# EAGLE board PROIECT_v39 (EAGLE 9.7.0)
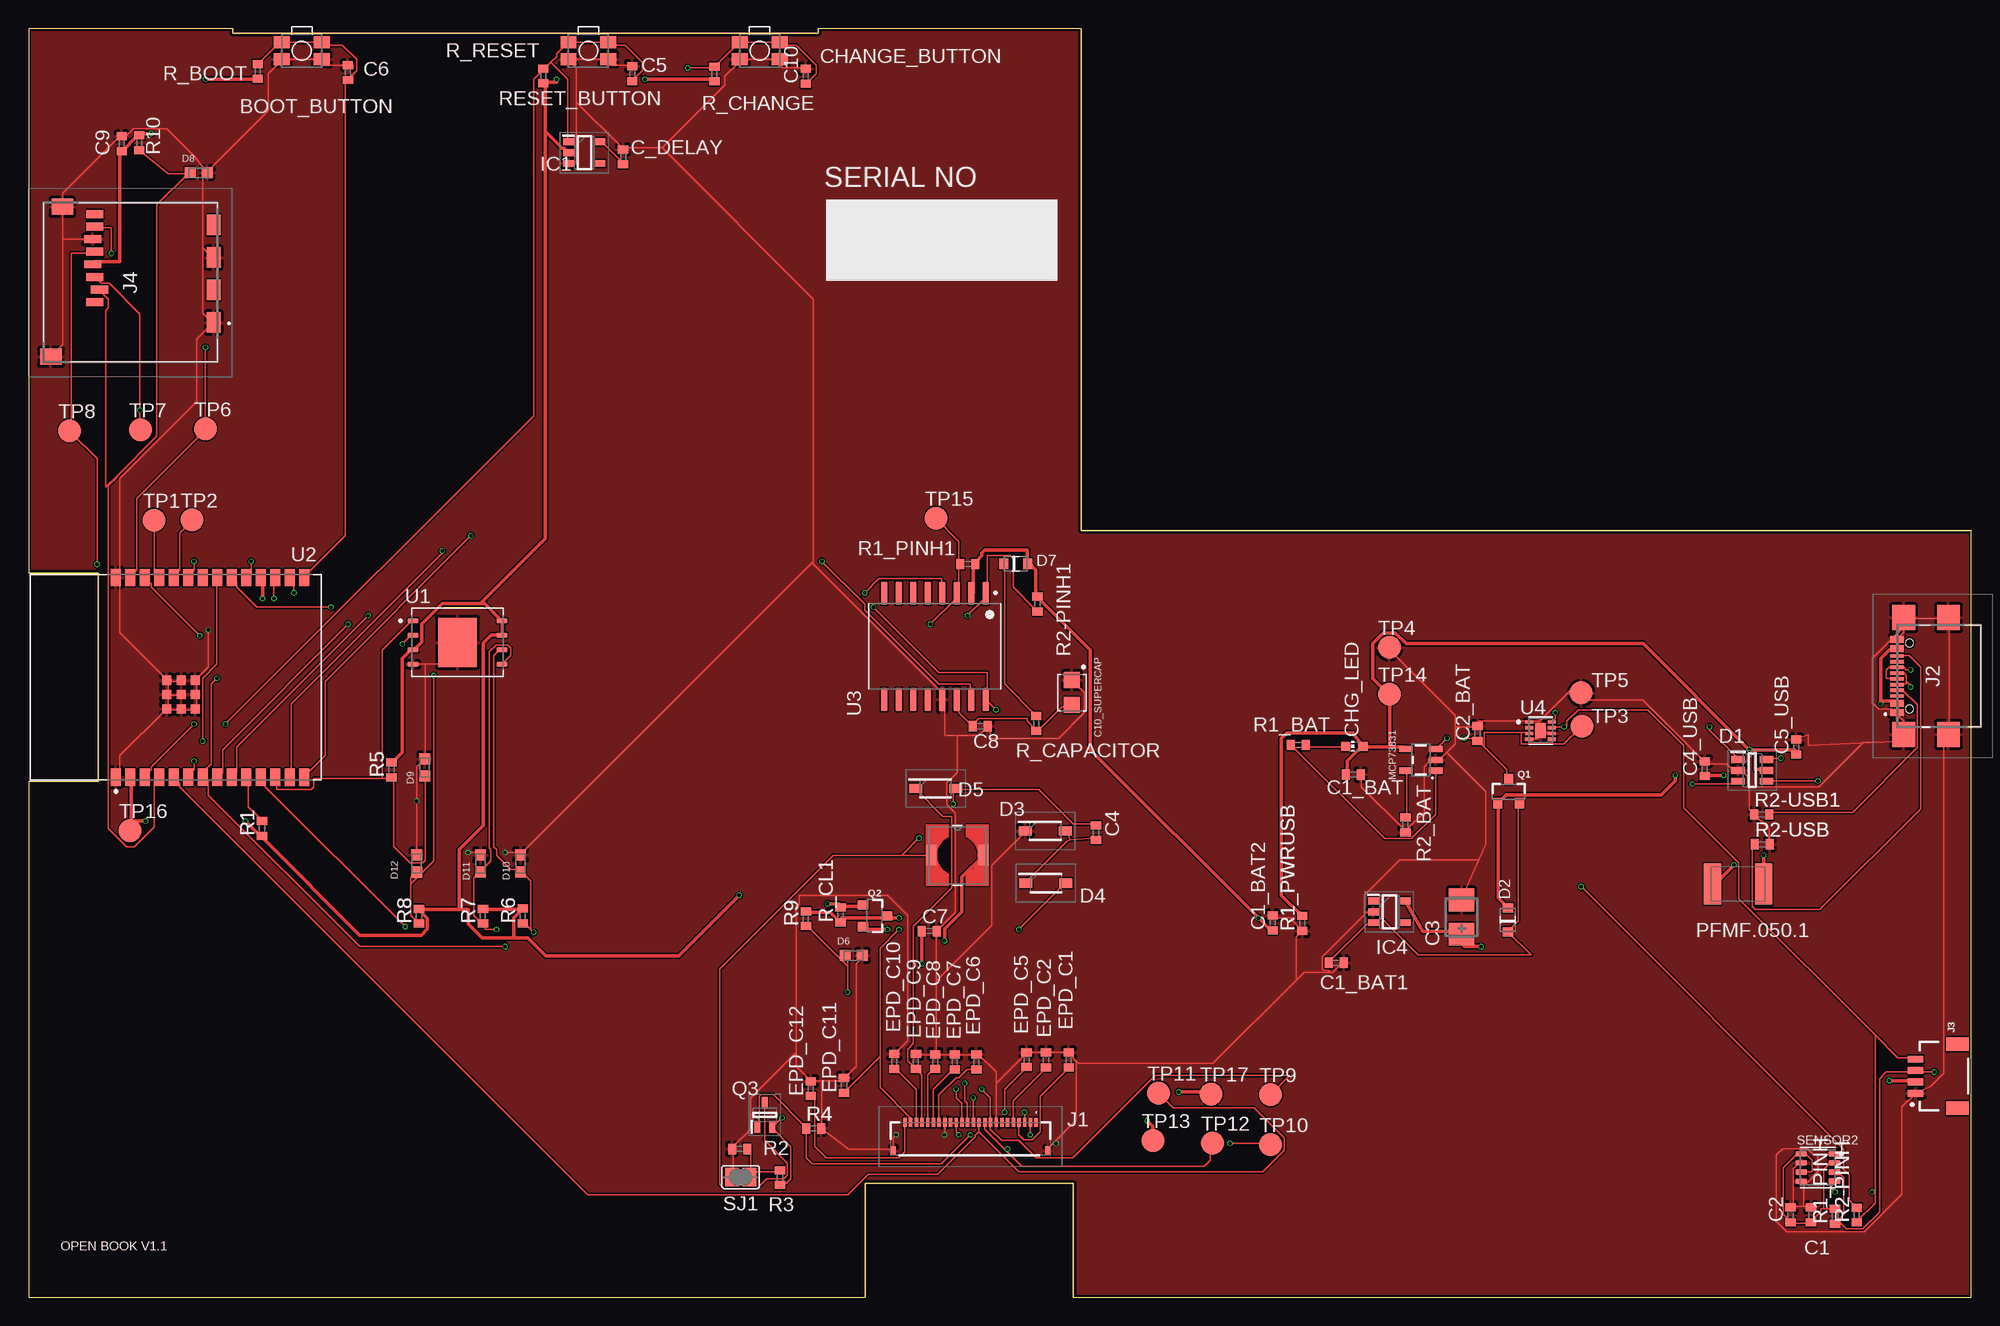
[diagram p0: board, top side]
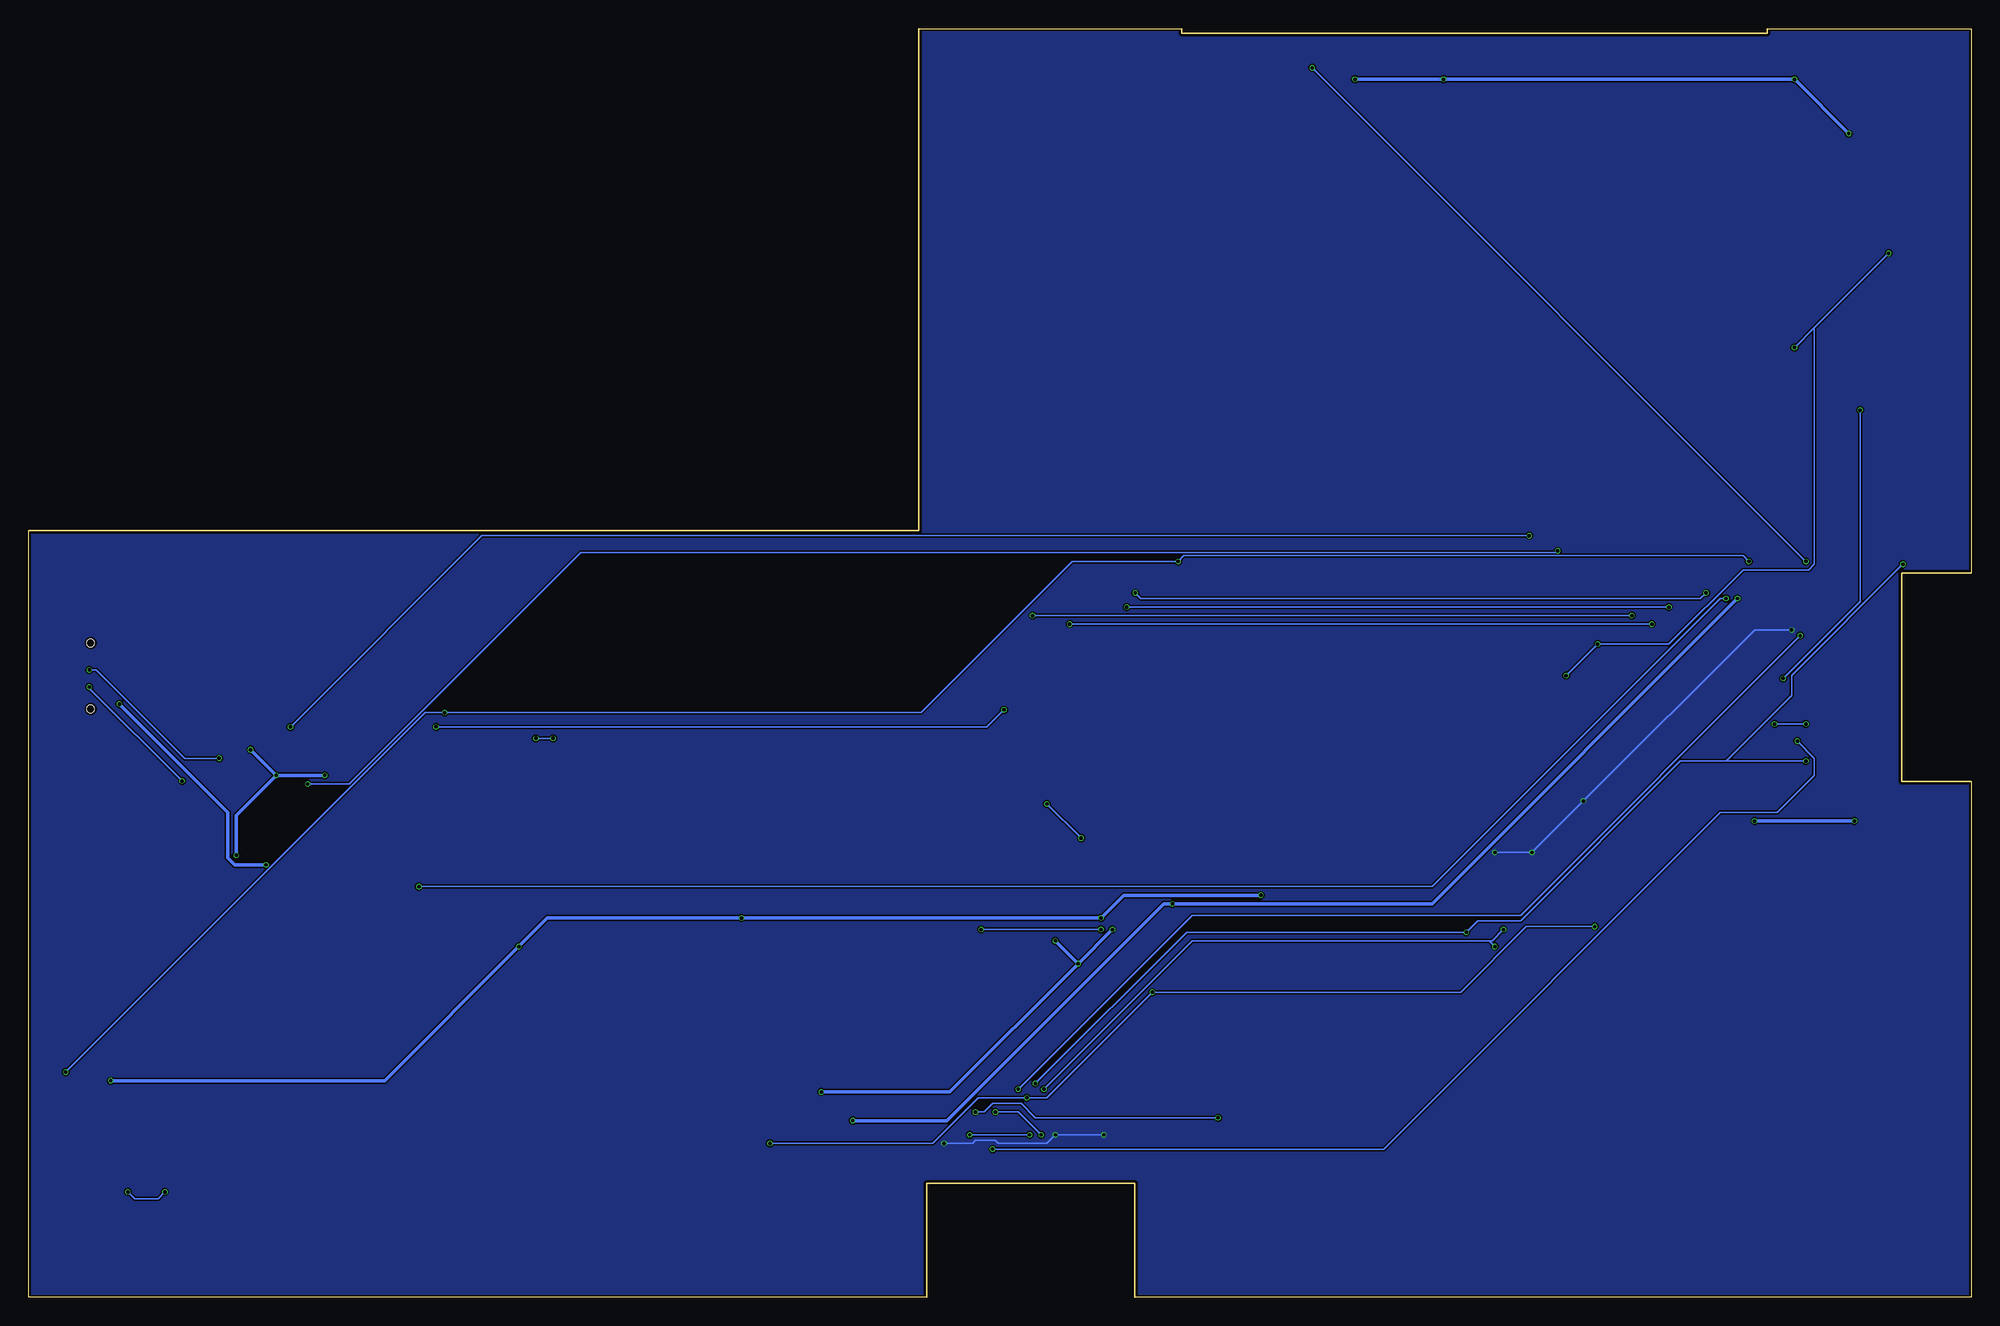
[diagram p1: board, bottom side, seen from below]

Size 170.2 x 111.2 mm. Coordinates in mm from the lower left corner, seen from the top.
Outline: 0,0 73.3,0 73.3,10 91.5,10 91.5,0 170.2,0 170.2,67.2 92.2,67.2 92.2,111.2 69.2,111.2 69.2,110.8 17.9,110.8 17.9,111.2 0,111.2 0,63.5 6.1,63.5 6.1,45.2 0,45.2 0,0
Copper layers (1*16): Top 0.035mm / dielectric 1.6mm / Bottom 0.035mm
Design rules "jlcpcb-2layers.dru": minimum track width 0.15mm, minimum drill 0.3mm, track to track 5mil, track to pad 5mil, pad to pad 5mil, via to via 5mil, smd to smd 5mil, copper to edge 0.2mm, drill to drill 6mil, minimum pad ring 10mil, minimum via ring 3mil, stop-mask expansion 4mil, vias tented up to drill 0mil, thermal gap 10mil
Net classes: 1 alimentare: width 0.3 mm

## Footprints (pad centres in the part's own frame; a part is rotated, then mirrored left to right if it is on the bottom)
MYBUTTON = smd 1.4 x 1.05: 1 1.75,0.75; 2 -1.75,0.75; 3 -1.75,-0.75; 4 1.75,-0.75
EAGLE-LTSPICE_C0402 = smd 0.7 x 0.9: 1 -0.65,0; 2 0.65,0
RCL_CT3528 = smd 2 x 2.2: + -1.5,0; - 1.5,0
CAPCP3225X100N = smd 1.4 x 1.4: 1 -1.1,0; 2 1.1,0
ADAFRUIT_CHIP-LED0603 = smd 0.8 x 0.8: A 0,-0.75; C 0,0.75
SOT95P280X145-6N = smd 1.2 x 0.6: 1 -1.25,0.95; 2 -1.25,0; 3 -1.25,-0.95; 4 1.25,-0.95; 5 1.25,0; 6 1.25,0.95
ESP32_WROVER_AVX---SD0805S020S1R0_AVX_SD0805S020S1R0_0 = smd 0.8 x 0.9: 1 -1.05,0; 2 1.05,0
SOD3716X135N = smd 1.15 x 0.8: 1 -1.75,0; 2 1.75,0
DIOC1608X36N = smd 0.97 x 0.94: 1 -0.75,0; 2 0.75,0
SOT95P280X125-5N = smd 0.9 x 0.6: 1 -1.4,0.95; 2 -1.4,0; 3 -1.4,-0.95; 4 1.4,-0.95; 5 1.4,0.95
SOT95P280X120-5N = smd 0.9 x 0.6: 1 -1.4,0.95; 2 -1.4,0; 3 -1.4,-0.95; 4 1.4,-0.95; 5 1.4,0.95
FH34SRJ24S05SH99 = smd 0.3 x 0.8: 1 5.75,1.45; 2 5.25,1.45; 3 4.75,1.45; 4 4.25,1.45; 5 3.75,1.45; 6 3.25,1.45; 7 2.75,1.45; 8 2.25,1.45; 9 1.75,1.45; 10 1.25,1.45; 11 0.75,1.45; 12 0.25,1.45; 13 -0.25,1.45; 14 -0.75,1.45; 15 -1.25,1.45; 16 -1.75,1.45; 17 -2.25,1.45; 18 -2.75,1.45; 19 -3.25,1.45; 20 -3.75,1.45; 21 -4.25,1.45; 22 -4.75,1.45; 23 -5.25,1.45; 24 -5.75,1.45 | smd 0.4 x 0.8: MP1 6.75,-1.05; MP2 -6.75,-1.05
SAMACSYS_PARTS_USB4110GFA = smd 0.3 x 1.15: A1 -3.35,3.678; A4 -2.55,3.678; A5 -1.25,3.678; A6 -0.25,3.678; A7 0.25,3.678; A8 1.25,3.678; A9 2.55,3.678; A12 3.35,3.678; B1 3.05,3.678; B4 2.25,3.678; B5 1.75,3.678; B6 0.75,3.678; B7 -0.75,3.678; B8 -1.75,3.678; B9 -2.25,3.678; B12 -3.05,3.678 | smd 2.18 x 2: MP1 -5.11,-0.827; MP2 5.11,-0.827; MP3 -5.11,3.103; MP4 5.11,3.103 | hole 0.65: -2.89,2.603; 2.89,2.603
JST04_1MM_RA = smd 0.6 x 1.35: 1 -1.5,0; 2 -0.5,0; 3 0.5,0; 4 1.5,0 | smd 1.2 x 2: NC1 2.8,-3.675; NC2 -2.8,-3.675
112ATAARR03ATTEND = smd 1.8 x 1.2: G1 10.6,10.4; G2 4.9,10.4; S1 7.75,10.4; S2 2.05,10.4 | smd 1.4 x 1.9: G3 13.6,-3.85; G4 0.45,-2.85 | smd 0.7 x 1.5: P1 8.8,0; P2 7.7,0.4; P3 6.6,0; P4 5.5,-0.2; P5 4.4,0; P6 3.3,-0.2; P7 2.2,0; P8 1.1,0
IND_4828-WE-TPC_WRE = smd 0.889 x 1.778: 1 -2.286,0; 2 2.286,0
ESP32_WROVER_SPARKFUN-IC-POWER_SOT23-5 = smd 0.55 x 1.2: 1 -0.95,-1.3; 2 0,-1.3; 3 0.95,-1.3; 4 0.95,1.3; 5 -0.95,1.3
ESP32C6_VARISTOR_CT/CN1812 = smd 1.5 x 3.6: 1 -2.25,0; 2 2.25,0
ESP32_WROVER_SPARKFUN-DISCRETESEMI_SOT23-3 = smd 0.8 x 0.9: 1 -0.95,-1; 2 0.95,-1; 3 0,1.1
SOT65P210X110-3N = smd 1.05 x 0.5: 1 -1.05,0.65; 2 -1.05,-0.65; 3 1.05,0
ESP32_WROVER_EAGLE-LTSPICE_R0402 = smd 0.7 x 0.9: 1 -0.65,0; 2 0.65,0
ESP32_WROVER_BME680_PSON80P300X300X100-8N = smd 1.016 x 0.5: 1 1.458,1.2; 2 1.458,0.4; 3 1.458,-0.4; 4 1.458,-1.2; 5 -1.458,-1.22; 6 -1.458,-0.4; 7 -1.458,0.4; 8 -1.458,1.2
SJ = smd 1.168 x 1.6: 1 -0.762,0; 2 0.762,0
TP20R = smd 2 x 2: TP 0,0
SON127P600X800X80-9N = smd 0.94 x 0.44: 1 -3.895,1.905; 2 -3.895,0.635; 3 -3.895,-0.635; 4 -3.895,-1.905; 5 3.895,-1.905; 6 3.895,-0.635; 7 3.895,0.635; 8 3.895,1.905 | smd 3.4 x 4.3: 9 0,0
XCVR_ESP32-C6-WROOM-1-N8 = smd 1.5 x 0.9: 1 -8.75,5.26; 2 -8.75,3.99; 3 -8.75,2.72; 4 -8.75,1.45; 5 -8.75,0.18; 6 -8.75,-1.09; 7 -8.75,-2.36; 8 -8.75,-3.63; 9 -8.75,-4.9; 10 -8.75,-6.17; 11 -8.75,-7.44; 12 -8.75,-8.71; 13 -8.75,-9.98; 14 -8.75,-11.25; 15 8.75,-11.25; 16 8.75,-9.98; 17 8.75,-8.71; 18 8.75,-7.44; 19 8.75,-6.17; 20 8.75,-4.9; 21 8.75,-3.63; 22 8.75,-2.36; 23 8.75,-1.09; 24 8.75,0.18; 25 8.75,1.45; 26 8.75,2.72; 27 8.75,3.99; 28 8.75,5.26 | smd 0.8 x 0.8: 29_1 -2.755,0.79; 29_2 -1.505,0.79; 29_3 -0.255,0.79; 29_4 -2.755,-0.46; 29_5 -1.505,-0.46; 29_6 -0.255,-0.46; 29_7 -2.755,-1.71; 29_8 -1.505,-1.71; 29_9 -0.255,-1.71
SOIC127P1032X265-16N = smd 2.05 x 0.59: 1 -4.655,4.445; 2 -4.655,3.175; 3 -4.655,1.905; 4 -4.655,0.635; 5 -4.655,-0.635; 6 -4.655,-1.905; 7 -4.655,-3.175; 8 -4.655,-4.445; 9 4.655,-4.445; 10 4.655,-3.175; 11 4.655,-1.905; 12 4.655,-0.635; 13 4.655,0.635; 14 4.655,1.905; 15 4.655,3.175; 16 4.655,4.445
SON50P200X200X80-9N = smd 0.76 x 0.27: 1 -0.985,0.75; 2 -0.985,0.25; 3 -0.985,-0.25; 4 -0.985,-0.75; 5 0.985,-0.75; 6 0.985,-0.25; 7 0.985,0.25; 8 0.985,0.75 | smd 0.9 x 1.3: 9 0,0

## Placement (x,y rotation side)
BOOT_BUTTON  BUTTON_CUSYOMV1.  [MYBUTTON]  23.94,109.25 180 top
C1  100nF  [EAGLE-LTSPICE_C0402]  156.15,7.23 90 top
C1_BAT  4.7uF  [EAGLE-LTSPICE_C0402]  116.04,45.82 0 top
C1_BAT1  4.7uF  [EAGLE-LTSPICE_C0402]  114.55,29.33 0 top
C1_BAT2  4.7uF  [EAGLE-LTSPICE_C0402]  108.99,32.83 90 top
C2  100nF  [EAGLE-LTSPICE_C0402]  154.35,7.24 90 top
C2_BAT  4.7uF  [EAGLE-LTSPICE_C0402]  126.93,49.42 90 top
C3  100uF TANT  [RCL_CT3528]  125.53,33.34 90 top
C4  4.7uF/25V  [EAGLE-LTSPICE_C0402]  93.51,40.73 90 top
C4_USB  100nF  [EAGLE-LTSPICE_C0402]  146.84,46.33 90 top
C5  1uF  [EAGLE-LTSPICE_C0402]  52.88,107.25 90 top
C5_USB  4.7uF  [EAGLE-LTSPICE_C0402]  154.85,48.23 90 top
C6  100nF  [EAGLE-LTSPICE_C0402]  27.98,107.34 90.7 top
C7  10uF  [EAGLE-LTSPICE_C0402]  78.91,32.11 0 top
C8  100nF  [EAGLE-LTSPICE_C0402]  83.38,50.06 0 top
C9  100nF  [EAGLE-LTSPICE_C0402]  8.16,101.11 90 top
C10  100nF  [EAGLE-LTSPICE_C0402]  68.08,107.03 90 top
C10_SUPERCAP  CPH3225A.  [CAPCP3225X100N]  91.4,53 270 top
C_DELAY  100nF  [EAGLE-LTSPICE_C0402]  52.08,99.95 90 top
CHANGE_BUTTON  BUTTON_CUSYOMV1.  [MYBUTTON]  64.05,109.25 180 top
CHG_LED  [ADAFRUIT_CHIP-LED0603]  116.15,48.3 90 top
D1  USBLC6-2SC6Y.  [SOT95P280X145-6N]  151,46.19 0 top
D2  ESP32_WROVER_AVX---SD0805S020S1R0_AVX_SD0805S020S1R0_0_0AVX_SD0805S020S1R0_0_0  [ESP32_WROVER_AVX---SD0805S020S1R0_AVX_SD0805S020S1R0_0]  129.59,33.1 90 top
D3  MBR0530.  [SOD3716X135N]  89.06,40.89 0 top
D4  MBR0530.  [SOD3716X135N]  89.12,36.3 0 top
D5  MBR0530.  [SOD3716X135N]  79.46,44.6 0 top
D6  PGB1010603MR.  [DIOC1608X36N]  72.3,29.97 0 top
D7  ESP32_WROVER_AVX---SD0805S020S1R0_AVX_SD0805S020S1R0_0_0AVX_SD0805S020S1R0_0_0  [ESP32_WROVER_AVX---SD0805S020S1R0_AVX_SD0805S020S1R0_0]  86.48,64.3 0 top
D8  PGB1010603MR.  [DIOC1608X36N]  14.9,98.56 0 top
D9  PGB1010603MR.  [DIOC1608X36N]  34.7,46.45 90 top
D10  PGB1010603MR.  [DIOC1608X36N]  43.1,38.04 90 top
D11  PGB1010603MR.  [DIOC1608X36N]  39.6,38.03 90 top
D12  PGB1010603MR.  [DIOC1608X36N]  34,38.02 90 top
EPD_C1  1uF/50V  [EAGLE-LTSPICE_C0402]  91.13,20.82 90 top
EPD_C2  1uF/50V  [EAGLE-LTSPICE_C0402]  89.13,20.83 90 top
EPD_C5  0.1uF/50V  [EAGLE-LTSPICE_C0402]  87.43,20.84 90 top
EPD_C6  1uF/50V  [EAGLE-LTSPICE_C0402]  83.03,20.65 90 top
EPD_C7  1uF/50V  [EAGLE-LTSPICE_C0402]  81.13,20.66 90 top
EPD_C8  1uF/50V  [EAGLE-LTSPICE_C0402]  79.43,20.67 90 top
EPD_C9  1uF/50V  [EAGLE-LTSPICE_C0402]  77.73,20.68 90 top
EPD_C10  1uF/50V  [EAGLE-LTSPICE_C0402]  75.83,20.68 90 top
EPD_C11  1uF/50V  [EAGLE-LTSPICE_C0402]  71.43,18.6 90 top
EPD_C12  1uF/50V  [EAGLE-LTSPICE_C0402]  68.53,18.31 90 top
IC1  BD5229G-TR.  [SOT95P280X125-5N]  48.69,100.33 0 top
IC4  XC6220A331MR-G.  [SOT95P280X120-5N]  119.21,33.79 0 top
J1  FH34SRJ-24S-0.5SH_99_.  [FH34SRJ24S05SH99]  82.52,13.89 0 top
J2  SAMACSYS_PARTS_USB4110-GF-ASAMA  [SAMACSYS_PARTS_USB4110GFA]  167.36,54.46 90 top
J3  QWIIC_RIGHT_ANGLE  [JST04_1MM_RA]  165.31,19.39 90 top
J4  112A-TAAR-R03_ATTEND  [112ATAARR03ATTEND]  5.82,96.03 270 top
L1  68uH  [IND_4828-WE-TPC_WRE]  81.37,38.75 0 top
MCP73831  ESP32_WROVER_SPARKFUN-IC-POWER_MCP73831.  [ESP32_WROVER_SPARKFUN-IC-POWER_SOT23-5]  121.97,47.11 90 top
PFMF.050.1  ESP32C6_VARISTORCN1812  [ESP32C6_VARISTOR_CT/CN1812]  149.76,36.24 0 top
Q1  20V/4.2A/52mΩ/1.4W  [ESP32_WROVER_SPARKFUN-DISCRETESEMI_SOT23-3]  129.66,44.31 0 top
Q2  20V/4.2A/52mΩ/1.4W  [ESP32_WROVER_SPARKFUN-DISCRETESEMI_SOT23-3]  74.1,33.44 270 top
Q3  SI1308EDL-T1-GE3.  [SOT65P210X110-3N]  64.49,16 90 top
R1  10K  [ESP32_WROVER_EAGLE-LTSPICE_R0402]  20.45,41.11 90 top
R1_BAT  200  [ESP32_WROVER_EAGLE-LTSPICE_R0402]  111.22,48.42 0 top
R1_PINH  10K  [ESP32_WROVER_EAGLE-LTSPICE_R0402]  158.25,7.11 90 top
R1_PINH1  10K  [ESP32_WROVER_EAGLE-LTSPICE_R0402]  82.28,64.27 0 top
R1_PWRUSB  100K  [ESP32_WROVER_EAGLE-LTSPICE_R0402]  111.58,32.77 90 top
R2  2.2  [ESP32_WROVER_EAGLE-LTSPICE_R0402]  62.29,13.01 0 top
R2-PINH  10K  [ESP32_WROVER_EAGLE-LTSPICE_R0402]  160.15,7.22 90 top
R2-PINH1  10K  [ESP32_WROVER_EAGLE-LTSPICE_R0402]  88.38,60.78 90 top
R2-USB  5k1  [ESP32_WROVER_EAGLE-LTSPICE_R0402]  151.88,39.71 0 top
R2-USB1  5k1  [ESP32_WROVER_EAGLE-LTSPICE_R0402]  151.83,42.33 0 top
R2_BAT  2K  [ESP32_WROVER_EAGLE-LTSPICE_R0402]  120.61,41.42 90 top
R3  0.47  [ESP32_WROVER_EAGLE-LTSPICE_R0402]  65.83,10.51 90 top
R4  10K  [ESP32_WROVER_EAGLE-LTSPICE_R0402]  68.77,14.81 0 top
R5  10K  [ESP32_WROVER_EAGLE-LTSPICE_R0402]  31.8,46.24 90 top
R6  10K  [ESP32_WROVER_EAGLE-LTSPICE_R0402]  43.3,33.43 90 top
R7  10K  [ESP32_WROVER_EAGLE-LTSPICE_R0402]  39.8,33.42 90 top
R8  10K  [ESP32_WROVER_EAGLE-LTSPICE_R0402]  34.2,33.41 90 top
R9  10K  [ESP32_WROVER_EAGLE-LTSPICE_R0402]  68.1,33.2 90 top
R10  10K  [ESP32_WROVER_EAGLE-LTSPICE_R0402]  9.7,101.19 90 top
R_BOOT  10K  [ESP32_WROVER_EAGLE-LTSPICE_R0402]  20.08,107.43 90 top
R_CAPACITOR  15  [ESP32_WROVER_EAGLE-LTSPICE_R0402]  88.28,50.29 90 top
R_CHANGE  10K  [ESP32_WROVER_EAGLE-LTSPICE_R0402]  60.08,107.22 90 top
R_CL1  10K  [ESP32_WROVER_EAGLE-LTSPICE_R0402]  71.13,33.52 90 top
R_RESET  10K  [ESP32_WROVER_EAGLE-LTSPICE_R0402]  45.08,107.04 90 top
RESET_BUTTON  BUTTON_CUSYOMV1.  [MYBUTTON]  49.05,109.25 180 top
SENSOR2  ESP32_WROVER_BME680_BME680.  [ESP32_WROVER_BME680_PSON80P300X300X100-8N]  156.75,11.39 0 top
SJ1  [SJ]  62.38,10.54 0 top
TP1  TPTP20R  [TP20R]  11,68.11 0 top
TP2  TPTP20R  [TP20R]  14.3,68.13 0 top
TP3  TPTP20R  [TP20R]  136.1,50.05 0 top
TP4  TPTP20R  [TP20R]  119.2,56.97 0 top
TP5  TPTP20R  [TP20R]  136,52.99 0 top
TP6  TPTP20R  [TP20R]  15.5,76.11 0 top
TP7  TPTP20R  [TP20R]  9.8,76.03 0 top
TP8  TPTP20R  [TP20R]  3.6,75.95 0 top
TP9  TPTP20R  [TP20R]  108.8,17.77 0 top
TP10  TPTP20R  [TP20R]  108.8,13.39 0 top
TP11  TPTP20R  [TP20R]  99,17.91 0 top
TP12  TPTP20R  [TP20R]  103.7,13.53 0 top
TP13  TPTP20R  [TP20R]  98.5,13.75 0 top
TP14  TPTP20R  [TP20R]  119.2,52.87 0 top
TP15  TPTP20R  [TP20R]  79.5,68.29 0 top
TP16  TPTP20R  [TP20R]  8.9,40.91 0 top
TP17  TPTP20R  [TP20R]  103.6,17.83 0 top
U1  W25Q512JVEIQ  [SON127P600X800X80-9N]  37.58,57.4 0 top
U2  ESP32-C6-WROOM-1-N8  [XCVR_ESP32-C6-WROOM-1-N8]  12.9,54.34 90 top
U3  DS3231SN#.  [SOIC127P1032X265-16N]  79.39,57.06 270 top
U4  MAX17048G+T10.  [SON50P200X200X80-9N]  132.45,49.68 0 top

## Library data of the parts
BOOT_BUTTON C1 C1_BAT C1_BAT1 C1_BAT2 C2 C2_BAT C3 C4 C4_USB C5 C5_USB C6-C10 C10_SUPERCAP C_DELAY CHANGE_BUTTON CHG_LED D1 D3-D6 D8-D12 EPD_C1 EPD_C2 EPD_C5-EPD_C12 IC1 IC4 J1-J3 L1 MCP73831 PFMF.050.1 Q3 R1 R1_BAT R1_PINH R1_PINH1 R1_PWRUSB R2 R2-PINH R2-PINH1 R2-USB R2-USB1 R2_BAT R3-R10 R_BOOT R_CAPACITOR R_CHANGE R_CL1 R_RESET RESET_BUTTON SJ1 TP1-TP11 TP16 TP17 U3 U4 = DeskAssistant v19 v1
D2 D7 = DeskAssistant v19 v1; NUME: SD0805S020S1R0
J4 = DeskAssistant v19 v1; DESCRIPTION: Micro SD Card Socket, Push-Push Type, Top Mount, SMT, H=1.83mm, 10u; HEIGHT: 1.9mm; MANUFACTURER_NAME: ATTEND; MANUFACTURER_PART_NUMBER: 112A-TAAR-R03 ATTEND
Q1 = DeskAssistant v19 v1; NUME: DMG2305UX-7
Q2 = DeskAssistant v19 v1; Q2: DMG2305UX-7
SENSOR2 = DeskAssistant v19 v1; NUME: BME688
TP12 = DeskAssistant v19 v1; ATR_TP12: EPD_RST
TP13 = DeskAssistant v19 v1; ATR_TP13: EPD_3V3_C
TP14 = DeskAssistant v19 v1; LALA: VBUS
TP15 = DeskAssistant v19 v1; ATR_TP15: INT_RTC
U1 = DeskAssistant v19 v1; AVAILABILITY: In Stock; CHECK_PRICES: https://www.snapeda.com/parts/W25Q512JVEIQ/Winbond+Electronics/view-part/?ref=eda; DESCRIPTION: FLASH - NOR Memory IC 512Mb (64M x 8) SPI - Quad I/O 133 MHz 8-WSON (8x6); MF: Winbond Electronics; MP: W25Q512JVEIQ; PACKAGE: Package; PRICE: None; SNAPEDA_LINK: https://www.snapeda.com/parts/W25Q512JVEIQ/Winbond+Electronics/view-part/?ref=snap
U2 = DeskAssistant v19 v1; AVAILABILITY: In Stock; CHECK_PRICES: https://www.snapeda.com/parts/ESP32-C6-WROOM-1-N8/Espressif+Systems/view-part/?ref=eda; DESCRIPTION: Multiprotocol Modules ESP32-C6 module, Wi-Fi 6 in 2.4 GHz band, Bluetooth 5, Zigbee 3.0 and Thread. ESP34-WROOM Compatible - ENGINEERING SAMPLE; MF: Espressif Systems; MP: ESP32-C6-WROOM-1-N8; PACKAGE: None; PRICE: None; SNAPEDA_LINK: https://www.snapeda.com/parts/ESP32-C6-WROOM-1-N8/Espressif+Systems/view-part/?ref=snap

## Nets
3V3 [alimentare]: C1_BAT2.1 C3.+ C9.1 D7.2 IC1.2 IC4.5 J3.2 J4.P4 Q2.3 R1.1 R1_PINH1.2 R2-PINH1.2 R5.2 R6.2 R7.2 R8.2 R9.2 R10.2 R_BOOT.1 R_CHANGE.1 R_CL1.1 R_RESET.1 TP16.TP U1.3 U1.7 U1.8 U2.2 U3.2
32KHZ: R2-PINH1.1 U2.9 U3.1
DN: D1.4 J2.A7 J2.B7
DP: D1.6 J2.A6 J2.B6
EDP_3V3: EPD_C5.1 J1.15 J1.16
EPD_3V3 [alimentare]: C7.1 L1.2 Q2.2 TP17.TP
EPD_3V3_C [alimentare]: Q2.1 R_CL1.2 TP13.TP U2.18
EPD_BUSY: J1.9 TP9.TP U2.26
EPD_CS: D6.1 J1.12 R9.1 TP10.TP U2.11
EPD_DC: J1.11 TP11.TP U2.5
EPD_RST: J1.10 TP12.TP U2.21
FLASH_CS: D9.1 R5.1 U1.1 U2.12
GDR: J1.2 Q3.1 R4.1
GND: BOOT_BUTTON.1 BOOT_BUTTON.2 C1.2 C1_BAT1.2 C1_BAT2.2 C1_BAT.2 C2.2 C2_BAT.2 C3.- C4_USB.2 C5.2 C5_USB.2 C6.2 C7.2 C8.2 C9.2 C10.2 C10_SUPERCAP.1 C_DELAY.2 CHANGE_BUTTON.1 CHANGE_BUTTON.2 D1.2 D3.1 D6.2 D8.2 D9.2 D10.2 D11.2 D12.2 EPD_C1.2 EPD_C2.2 EPD_C5.2 EPD_C6.2 EPD_C7.2 EPD_C8.2 EPD_C9.2 EPD_C10.2 EPD_C11.2 EPD_C12.2 IC1.3 IC4.2 J1.8 J1.17 J1.MP1 J1.MP2 J2.A1 J2.A12 J2.B1 J2.B12 J2.MP1 J2.MP2 J2.MP3 J2.MP4 J3.1 J4.G1 J4.G2 J4.G3 J4.G4 J4.P6 MCP73831.2 R1_PWRUSB.1 R2-USB1.1 R2-USB.2 R2.1 R2_BAT.1 R4.2 RESET_BUTTON.1 RESET_BUTTON.2 SENSOR2.1 SENSOR2.5 SENSOR2.7 SJ1.1 TP4.TP TP5.TP U1.4 U1.9 U2.1 U2.28 U2.29_1 U2.29_2 U2.29_3 U2.29_4 U2.29_5 U2.29_6 U2.29_7 U2.29_8 U2.29_9 U3.13 U4.1 U4.4 U4.6 U4.9
GPIO8: R1.2 U2.10
I2C_PW: C1.1 C2.1 R1_PINH.2 R2-PINH.2 SENSOR2.2 SENSOR2.6 SENSOR2.8 U2.17
INT_RTC: R1_PINH1.1 TP15.TP U2.8 U3.3
IO/BOOT: BOOT_BUTTON.3 BOOT_BUTTON.4 C6.1 R_BOOT.2 U2.15
IO/CHANGE: C10.1 CHANGE_BUTTON.3 CHANGE_BUTTON.4 R_CHANGE.2 U2.23
MISO: D12.1 J4.P7 R8.1 TP6.TP U1.2 U2.27
MOSI: D11.1 J1.14 J4.P3 R7.1 TP7.TP U1.5 U2.7
N$1: C1_BAT1.1 D2.1 IC4.1 IC4.3 Q1.2
N$2: CHG_LED.C R1_BAT.2
N$3: MCP73831.1 R1_BAT.1
N$4: J2.A5 R2-USB1.2
N$5: C4.1 D3.2 D4.1
N$6: EPD_C12.1 J1.24
N$7: MCP73831.5 R2_BAT.2
N$9: EPD_C10.1 J1.22
N$10: C_DELAY.1 IC1.5
N$11: EPD_C8.1 J1.20
N$12: J2.B5 R2-USB.1
N$13: EPD_C7.1 J1.19
N$14: EPD_C6.1 J1.18
N$17: EPD_C2.1 J1.5
N$18: EPD_C1.1 J1.4
N$22: D7.1 R_CAPACITOR.2
PREVGH: D5.1 EPD_C9.1 J1.21
PREVGL: D4.2 EPD_C11.1 J1.23
RESE: J1.3 Q3.2 R3.1
RESE': R2.2 R3.2 SJ1.2
RESET: C5.1 IC1.1 R_RESET.2 RESET_BUTTON.3 RESET_BUTTON.4 U2.3
RTC_RST: U2.16 U3.4
RX: TP2.TP U2.24
SCK: D10.1 J1.13 J4.P5 R6.1 TP8.TP U1.6 U2.6
SCL: J3.4 R2-PINH.1 SENSOR2.4 U2.20 U3.16 U4.7
SDA: J3.3 R1_PINH.1 SENSOR2.3 U2.19 U3.15 U4.8
SRC: C4.2 D5.2 L1.1 Q3.3
SS_SD: D8.1 J4.P2 R10.1 U2.4
TX: TP1.TP U2.25
USB_D+: D1.1 U2.14
USB_D-: D1.3 U2.13
VBAT: C2_BAT.1 MCP73831.3 Q1.3 TP3.TP U4.2 U4.3
VBUS [alimentare]: C1_BAT.1 C4_USB.1 C5_USB.1 CHG_LED.A D1.5 D2.2 MCP73831.4 PFMF.050.1.2 Q1.1 R1_PWRUSB.2 TP14.TP
VRTC: C8.1 C10_SUPERCAP.2 R_CAPACITOR.1 U3.14
VUSB [alimentare]: J2.A4 J2.A9 J2.B4 J2.B9 PFMF.050.1.1

## Tracks (layer width: path | path; a pad name or v marks a point on that pad's centre or on a via)
3V3  (via drill 0.3)
  Top 0.3: R5.2 32,47 32.75,47.75 32.75,56 33.5,56.75 U1.3 33.75,56.75 34.43,57.43 34.43,59 36.23,60.8 39.95,60.8 | 39.95,60.8 39.75,61 45.25,66.5 45.25,102.2 | 39.95,60.8 41.25,59.5 U1.8 41.5,59.25 41.5,58.25 U1.7 40.53,58.03 39.85,57.35 39.85,41.35 37.75,39.25 37.75,34 | 9,41.75 9,41 TP16.TP 9,41.75 | 9,41.75 9,45.5 U2.2 | 37.75,34 38.5,34 38.5,32.75 39.75,31.5 42.5,31.5 | 37.75,34 34.3,34 | 34.3,34 34.25,34 R8.2 | 42.5,31.5 42.5,33.25 43.25,34 | 43.25,34 40,34 R7.2 | 43.25,34 R6.2 | 9,41.75 v10.25,41.75 | v19,41.75 20.25,40.5 R1.1 20.5,40.25 29,31.75 34.38,31.75 34.93,32.3 34.93,33.23 34.3,33.85 34.3,34 | 45.25,102.2 45.25,106.25 R_RESET.1 45.25,106.5 46.25,106.5 v46.25,106.75 | v15.5,106.75 20,106.75 R_BOOT.1 | v10.75,102 9.75,102 R10.2 9.5,101.75 8.25,100.5 C9.1 8,100.25 8,90.75 5.75,90.75 J4.P4 | v54,106.75 60,106.75 R_CHANGE.1 | U3.2 82.75,61.75 82.75,64.25 R1_PINH1.2 83,64.5 83.5,65 83.5,65.25 83.75,65.5 87.5,65.5 87.5,64.5 D7.2 87.75,64.25 88.25,63.75 88.25,61.5 R2-PINH1.2 88.5,61.25 93,56.75 93,48 v107.75,33.25 108.75,32.25 C1_BAT2.1 | R9.2 68.25,33.75 70.25,33.75 R_CL1.1 71.25,33 71.25,33.25 75,33.25 Q2.3 75.25,33.25 v76.25,33.25 | IC4.5 122.15,32.1 125.4,32.1 125.5,32 C3.+ 125.75,31.75 125.75,30.75 v127.25,30.75 | v163,19 165.3,19 J3.2 | 42.5,31.5 43.75,31.5 45.3,29.95 56.95,29.95 v62.25,35.25 | IC1.2 46.92,100.7 46.73,100.7 46.56,100.86 46.56,100.89 45.25,102.2
  Bottom 0.3: v19,41.75 v10.25,41.75 | v10.75,102 v15.5,106.75 v46.25,106.75 v54,106.75 | v163,19 139,19 v127.25,30.75 124.75,33.25 v107.75,33.25 v76.25,33.25 74.25,35.25 v62.25,35.25
32KHZ  (via drill 0.3)
  Top 0.152: R2-PINH1.1 88.25,60.25 86.25,62.25 86.25,64.75 86,65 84,65 84,61.75 U3.1 83.75,61.5 83.75,61.25 v82.25,59.75 | v29.75,59.75 18.25,48.25 18.25,46 18,45.75 U2.9
  Bottom 0.152: v82.25,59.75 v29.75,59.75
DN  (via drill 0.3)
  Top 0.152: 164.5,54 164.5,54.5 164.25,54.75 163.75,54.75 J2.A7 | 164.5,54 164.5,53.75 163.75,53.75 J2.B7 | v156.75,45.25 D1.4 | 164.5,54 164.87,53.63 v164.87,53.5
  Bottom 0.152: v164.87,53.5 164.87,53.37 v156.75,45.25
DP  (via drill 0.3)
  Top 0.152: J2.A6 163.5,54.25 162.75,54.25 162.75,55 163,55.25 163.5,55.25 J2.B6 163.75,55.25 164.25,55.25 164.5,55 v164.87,55 | v153.5,47.25 152.25,47.25 D1.6
  Bottom 0.152: v153.5,47.25 156.5,47.25 164.25,55 v164.87,55
EDP_3V3  (via drill 0.3)
  Top 0.152: 81.25,15.25 80.75,15.25 J1.16 | v85.5,16.25 85.5,18.25 87.25,20 EPD_C5.1 | v81.5,14.25 81.25,14.5 81.25,15.25 | 81.25,15.25 J1.15
  Bottom 0.152: v85.5,16.25 83.5,16.25 v81.5,14.25
EPD_3V3  (via drill 0.3)
  Top 0.3: v75.25,32.25 73.25,32.25 Q2.2 | v78.25,29.25 78.25,32 C7.1 | v100.75,18 103.5,18 TP17.TP | L1.2 81.76,36.85 81.75,36.85 81.75,33.8 80.25,32.3 v80.25,31.25
  Bottom 0.3: v78.25,29.25 v75.25,32.25 | v100.75,18 89.5,18 v78.25,29.25 | v78.25,29.25 v80.25,31.25
EPD_3V3_C  (via drill 0.3)
  Top 0.3: Q2.1 73,34.25 71.25,34.25 R_CL1.2 71,34.25 71,34.5 v70,34.5 | v20.5,61.25 20.5,63 U2.18 | v98,15.5 98.5,15 TP13.TP
  Bottom 0.3: v20.5,61.25 47.25,34.5 v70,34.5 70.75,34.5 89.75,15.5 v98,15.5
EPD_BUSY  (via drill 0.3)
  Top 0.152: TP9.TP 110.45,19.42 110.45,19.45 98.7,19.45 91.49,12.24 88.26,12.24 86.75,13.75 85.25,13.75 84.25,14.75 84.25,15.25 J1.9 84.25,15.5 84.25,17.5 v83.5,18.25 | v15,58 10.75,62.25 10.75,62.5 10.25,63 U2.26
  Bottom 0.152: v15,58 39.5,33.5 68.25,33.5 v83.5,18.25
EPD_CS  (via drill 0.3)
  Top 0.152: v82.75,17.5 82.75,15.5 J1.12 | 71.75,29 71.75,29.75 D6.1 | 71.75,29 v71.75,26.75 | 71.75,29 68.25,32.5 R9.1 | v33,32.5 20.75,44.75 20.75,45.25 20.5,45.5 U2.11 | v105.25,13.5 108.75,13.5 TP10.TP
  Bottom 0.152: v33,32.5 39,32.5 44.75,26.75 v71.75,26.75 81,17.5 v82.75,17.5 87,17.5 91,13.5 v105.25,13.5
EPD_DC
  Top 0.152: 83.25,14.5 83.25,15.25 J1.11 | 83.25,14.5 86.75,11 108.11,11 110,12.89 110,14 107.37,16.63 100.28,16.63 TP11.TP | U2.5 12.75,45.5 13.25,45 13.25,44.75 49,9 71.75,9 73.55,10.8 79.66,10.8 82.95,14.09 82.95,14.2 83.25,14.5
EPD_RST  (via drill 0.3)
  Top 0.152: 85.5,13 87,11.5 103,11.5 103.5,12 103.5,13.5 TP12.TP | 85.5,13 83.75,14.75 83.75,15.25 J1.10 | v15.25,48.75 15.25,54.25 16.5,55.5 16.5,63 U2.21 | 85.5,13 v85.75,13
  Bottom 0.152: v15.25,48.75 13.75,47.25 13.75,45.75 17,42.5 22,42.5 51.5,13 v85.75,13
FLASH_CS
  Top 0.152: 31,45.5 25,45.5 25,44.75 24.75,44.5 21.75,44.5 21.75,45.5 U2.12 | 31,45.5 31.75,45.5 R5.1 32,45.5 32,39.53 33.45,38.08 34.55,38.08 34.75,38.28 34.75,45.5 D9.1 | 31,45.5 31,56.75 33.5,59.25 U1.1
GDR  (via drill 0.3)
  Top 0.152: v87.75,14.25 87.75,15.25 J1.2 | Q3.1 64,15 64,17.62 64.16,17.78 65.22,17.78 68,15 R4.1 68.12,12.23 68.63,11.72 79.97,11.72 v82.5,14.25
  Bottom 0.152: v82.5,14.25 v87.75,14.25
GND  (via drill 0.3)
  Top 0.152: C1_BAT2.2 109,33.25 110.75,33.25 110.75,33 111.5,32.25 R1_PWRUSB.1 111.05,31.59 111.05,27.8 | 114.05,28.5 111.75,28.5 111.05,27.8 | 114.05,28.5 114.25,28.5 115,29.25 C1_BAT1.2 | 117,33.75 117.75,33.75 IC4.2 | C1_BAT.2 116.75,45.75 116.75,44.75 120.5,41 R2_BAT.1 120.75,41 122.25,42.5 122.25,46.5 122.75,47 123.25,47 MCP73831.2 123.5,47 124.25,47.75 | U4.4 131.5,49 132.25,49 132.25,49.5 U4.9 | 132.25,50.5 131.5,50.5 U4.1 131.25,50.5 127,50.5 127,50.25 C2_BAT.2 126.75,50 125,50 | 132.25,50.5 132.25,49.75 U4.9 | U4.6 133.25,49.5 132.5,49.5 U4.9 | 125,50 125,48.5 124.25,47.75 | 125,50 125,51 119.25,56.75 TP4.TP | 127.05,38.35 127.65,39.71 127.65,44.35 124.25,47.75 | 127.05,38.35 125.52,34.88 C3.- | 117,33.75 117,35.25 120.1,38.35 127.05,38.35 | R2-USB.2 152.5,39.75 152.5,41 151.25,42.25 R2-USB1.1 151,42.5 150.75,42.75 150.75,44.8 | 150.75,44.8 150.75,45.5 150.25,46 149.75,46 D1.2 149.75,46.25 149.25,46.25 148.75,46.75 147,46.75 C4_USB.2 146.75,47 141.4,52.35 136,52.35 TP5.TP 136,53.35 135.24,53.35 132.39,50.5 132.25,50.5 | J2.A1 163.75,51.25 163.75,51.5 J2.B12 | 161.4,48.62 163.63,48.72 J2.MP3 164.25,49.5 164.25,50.5 163.75,51 J2.A1 | 161.4,48.62 155.9,48.38 155.9,49.32 C5_USB.2 | 163.75,57.75 163.75,57.5 J2.B1 | 163.75,57.75 164.25,58.25 164.25,58.75 | 164.25,58.75 164.25,59.5 J2.MP4 | 163.75,57.75 J2.A12 | J2.MP4 164.5,59.5 168,59.5 J2.MP2 168.25,59.5 168.25,49.5 J2.MP1 168,49.25 167.78,49.03 167.78,19.64 166.65,18.5 J3.1 164.11,16.69 164.11,9.05 160.8,5.74 154.01,5.74 153.09,6.66 153.09,12.49 153.65,13.04 155.85,13.04 156.39,12.5 156.75,12.5 | 155.5,8 156,8 C1.2
  Top 0.152: 155.5,8 154.6,8 | 154.6,8 154.5,8 C2.2 | 155.5,8 155.5,9.75 | 155.5,9.75 155.5,10 SENSOR2.5 | SENSOR2.7 155.25,11.75 155.04,11.75 154.58,11.29 154.58,10.69 154.6,10.67 154.6,8 | 156.75,12.5 158,12.5 SENSOR2.1 | 156.75,12.5 156.75,11 155.5,9.75 | 164.25,58.75 161.5,56 161.5,52.14 162.09,51.56 163.23,51.56 J2.A1 | 164.25,58.75 J2.MP4 | 3,92.75 5.5,92.75 J4.P6 | 3,92.75 3,95.5 J4.G4 3,95.75 3,96.75 8,101.75 C9.2 8.53,101.76 9.2,102.43 12.09,102.43 14.5,100.02 D8.2 | 3,92.75 3,83.5 2,82.5 J4.G3 | 12.25,54 13.25,54 U2.29_6 | 12.25,52.75 13.25,52.75 U2.29_5 | U2.29_1 12.25,51.5 13.25,51.5 U2.29_4 13.5,51.5 14.5,51.5 U2.29_7 14.75,51.75 14.75,52.75 U2.29_8 14.75,53 14.75,54 U2.29_9 14.75,54.25 15.75,55.25 v15.75,58.5 | 12.25,52.75 12.25,51.75 U2.29_1 | 12.25,52.75 U2.29_2 12.25,53 12.25,54 | 12.25,54 U2.29_3 12,54.25 8,58.25 8,62.75 7.75,63 U2.28 7.75,63.25 8,63.5 8,71.75 14.75,78.5 14.75,84 16,85.25 J4.G1 16,85.5 15.25,86.25 15.25,92 | U2.1 7.75,45.75 8,46 8,47.5 12,51.5 U2.29_1 | C6.2 27.75,108 25.75,108 25.75,108.25 BOOT_BUTTON.2 25.5,108.5 22.25,108.5 BOOT_BUTTON.1 22,108.25 21,107.25 21,104 15.75,98.75 D8.2 | 15.25,92 15.25,98.25 15.5,98.5 D8.2 | 15.25,92 16,91.25 J4.G2 | 75.75,13 71.83,13 R4.2 69.5,15 69.5,19 | v80.25,14.25 80.25,15.25 J1.17 | v76,14.25 75.75,14 75.75,13 | 75.75,13 J1.MP2 | SJ1.1 61.75,10.75 61.75,13 R2.1 61.75,13.25 63.25,14.75 63.25,17.5 67.25,21.5 | 69.5,19 71.25,19 71.25,19.25 EPD_C11.2 71.5,19.25 72.5,20.25 72.5,29.25 73,29.75 D6.2 | 69.5,19 68.75,19 EPD_C12.2 68.5,19 67.25,20.25 67.25,21.5 | 67.25,21.5 67.25,34.25 67.5,34.5 67.5,35.25 75.25,35.25 77,33.5 77,22.5 76,21.5 EPD_C10.2
  Top 0.152: 34.75,55.5 37.5,55.5 37.5,57.25 U1.9 | 34.75,55.5 33.75,55.5 U1.4 | D12.2 v34,43.5 34,46.5 D9.2 34.75,47.25 34.75,55.5 | v38.5,39 39.5,39 D11.2 | v41.75,39 43,39 D10.2 43.25,39 68.75,64.5 | C10.2 68,107.75 66,107.75 66,108.25 CHANGE_BUTTON.2 65.75,108.5 62.5,108.5 CHANGE_BUTTON.1 62.25,108.25 61,107 61,106.25 55.5,100.75 | C5.2 52.75,108 51,108 51,108.25 RESET_BUTTON.2 50.75,108.5 47.5,108.5 RESET_BUTTON.1 47.5,108.25 48,107.75 48,104.75 | 48,104.75 48,99.5 47.5,99.5 IC1.3 | 48,104.75 52,100.75 C_DELAY.2 52.25,100.75 55.5,100.75 | 81.35,49.25 80.25,49.25 80.25,52.25 U3.13 80,52.5 80,53 68.75,64.25 68.75,64.5 | 81.35,49.25 83.25,49.25 84,50 C8.2 84.25,50 84.25,49 90.25,49 92.5,51.25 92.5,53 C10_SUPERCAP.1 | 89.75,13.5 91.8,15.55 91.8,20.7 | 89.75,13.5 89.25,13 J1.MP1 | 91.8,20.7 91.25,21.25 EPD_C1.2 91,21.5 89.25,21.5 EPD_C2.2 89,21.5 87.5,21.5 EPD_C5.2 87.25,21.25 84.75,18.75 | 91.8,20.7 92,20.5 103.75,20.5 111.05,27.8 | 84.75,18.75 84.75,19.75 83.25,21.25 EPD_C6.2 83,21.25 81.25,21.25 EPD_C7.2 81,21.25 79.5,21.25 EPD_C8.2 | 84.75,18.75 84.75,15.5 J1.8 | EPD_C9.2 77.75,21.25 79.25,21.25 EPD_C8.2 | 79.5,27.75 79.5,21.5 EPD_C8.2 | 79.5,27.75 79.5,32 C7.2 81.18,33.73 81.18,42.47 80.43,43.21 80.43,45.08 81.35,46 81.35,49.25 | 79.5,27.75 84.37,32.62 84.37,37.87 87.31,40.81 D3.1 | 55.5,100.75 68.75,87.5 68.75,64.5 | 89.75,13.5 v90,13.5 | 114.05,28.5 113.87,28.68 113.47,28.68 113.35,28.8 113.35,29.86 117,33.52 117,33.75 | 150.75,44.8 151.5,44.8 151.57,44.74 156.84,44.74 160.73,48.62 161.4,48.62
  Bottom 0.152: v76,14.25 v80.25,14.25 81,13.5 85.25,13.5 85.5,13.75 87.25,13.75 87.5,13.5 v90,13.5 | v41.75,39 v38.5,39 v34,43.5 19,58.5 v15.75,58.5
  pour Top: 6.16,45.16 6.14,45.14 6.12,45.12 0.08,45.12 0.08,0.08 73.22,0.08 73.22,10.02 73.24,10.04 73.26,10.06 73.28,10.08 91.52,10.08 91.54,10.06 91.56,10.04 91.58,10.02 91.58,0.08 170.12,0.08 170.12,67.12 92.18,67.12 92.16,67.14 92.14,67.16 92.12,67.18 92.12,111.12 69.28,111.12 69.28,110.78 69.26,110.76 69.24,110.74 69.22,110.72 17.88,110.72 17.86,110.74 17.84,110.76 17.82,110.78 17.82,111.12 0.08,111.12 0.08,63.58 6.12,63.58 6.14,63.56 6.16,63.54 6.18,63.52 6.18,45.18
  pour Bottom: 6.16,45.16 6.14,45.14 6.12,45.12 0.08,45.12 0.08,0.08 73.22,0.08 73.22,10.02 73.24,10.04 73.26,10.06 73.28,10.08 91.52,10.08 91.54,10.06 91.56,10.04 91.58,10.02 91.58,0.08 170.12,0.08 170.12,67.12 92.18,67.12 92.16,67.14 92.14,67.16 92.12,67.18 92.12,111.12 69.28,111.12 69.28,110.78 69.26,110.76 69.24,110.74 69.22,110.72 17.88,110.72 17.86,110.74 17.84,110.76 17.82,110.78 17.82,111.12 0.08,111.12 0.08,63.58 6.12,63.58 6.14,63.56 6.16,63.54 6.18,63.52 6.18,45.18
GPIO8
  Top 0.152: R1.2 20.25,42 19.25,43 19.25,45.5 U2.10
I2C_PW  (via drill 0.3)
  Top 0.152: SENSOR2.6 155.5,11 156.25,11 156.25,12 155.5,12.75 SENSOR2.8 155.25,12.5 154.85,12.5 153.7,11.34 153.7,7.3 154.25,6.75 C2.1 154.5,6.5 156,6.5 C1.1 156.25,6.75 157,7.5 157,7.75 157.25,7.75 | 157.25,7.75 R1_PINH.2 | 159,11.25 158.25,12 SENSOR2.2 158,12 157.25,11.25 157.25,7.75 | 159,11.25 159.5,10.75 159.5,8.5 160,8 R2-PINH.2 | v21.5,61.25 21.5,63 U2.17 | v136,36 159,13 159,11.25
  Bottom 0.152: v21.5,61.25 22,61.25 47.25,36 v136,36
INT_RTC  (via drill 0.3)
  Top 0.152: v28,59 17,48 17,46 16.75,45.75 U2.8 | v79,59 81.25,61.25 81.25,61.5 U3.3 81.5,61.75 81.5,64.25 R1_PINH1.1 81.5,64.5 81.5,66.25 79.5,68.25 TP15.TP
  Bottom 0.152: v79,59 v28,59
IO/BOOT
  Top 0.152: R_BOOT.2 22,110 BOOT_BUTTON.4 22.25,110 25.5,110 BOOT_BUTTON.3 25.75,109.75 27.5,109.75 28.75,108.5 28.75,107.5 28,106.75 C6.1 27.75,106.5 27.75,66.75 24.25,63.25 U2.15
IO/CHANGE  (via drill 0.3)
  Top 0.152: C10.1 68.25,106.5 69,107.25 69,108 67.25,109.75 66,109.75 CHANGE_BUTTON.3 65.75,110 62.5,110 CHANGE_BUTTON.4 62.25,110 60.25,108 R_CHANGE.2 60,107.75 v57.75,107.75 | v14.5,64.5 14.5,63.75 14,63.25 U2.23
  Bottom 0.152: v57.75,107.75 v14.5,64.5
MISO  (via drill 0.3)
  Top 0.152: 33.5,36.25 33.5,36.75 34,37.25 D12.1 | 33.5,36.25 33.5,33.5 34,33 R8.1 | v32.75,57.25 33.5,58 U1.2 | v35.5,54.5 35.5,38.25 33.5,36.25 | v7.25,91.5 7.25,93.75 6,93.75 J4.P7 | v15.5,83.25 TP6.TP 15.5,76 9.5,70 9.5,63.75 9,63.25 U2.27
  Bottom 0.152: v35.5,54.5 v32.75,57.25 26.5,57.25 20,63.75 14.25,63.75 13.75,64.25 13.75,85 | v15.5,83.25 13.75,85 | 13.75,85 v7.25,91.5
MOSI  (via drill 0.3)
  Top 0.152: U1.5 41.5,55.5 42.25,56.25 42.25,56.94 42,57.19 40.95,57.19 40.35,56.59 40.35,39.4 40.5,39.25 40.5,38.25 39.75,37.5 D11.1 39.5,37.25 39,36.75 39,33.5 39.75,32.75 R7.1 40,32.75 40,32.25 v41,32.25 | TP7.TP 9.75,76.25 v9.75,77.75 9.75,86.18 7.05,88.88 6.36,88.88 J4.P3 | v81.25,18.25 81.25,17.5 81.75,17 81.75,15.5 J1.14 | v41.75,30.75 29,30.75 15.75,44 15.75,45.25 15.5,45.5 U2.7 15.5,45.75 15.5,46.25 16,46.75 16,53.75 v16.5,54.25
  Bottom 0.152: v81.25,18.25 68.25,31.25 42.25,31.25 | 42.25,31.25 42,31.25 v41,32.25 | 42.25,31.25 v41.75,30.75 | v9.75,77.75 9.75,61 v16.5,54.25
N$1
  Top 0.152: C1_BAT1.1 114,29.5 117.25,32.75 117.75,32.75 IC4.3 118,32.75 118.5,33.25 | 118.5,33.25 118.5,34.5 118,34.5 IC4.1 | Q1.2 130.5,43.25 130.5,33 129.75,32.25 D2.1 131.64,30 121.75,30 118.5,33.25
N$2
  Top 0.152: CHG_LED.C 115.25,48.25 112,48.25 R1_BAT.2
N$3
  Top 0.152: R1_BAT.1 110.75,48.25 118.78,40.22 121.14,40.22 123.25,42.32 123.25,46 MCP73831.1
N$4
  Top 0.152: J2.A5 163.75,53.25 164.15,53.25 165.46,51.94 165.46,48.18 159.78,42.5 152.65,42.5 R2-USB1.2
N$5
  Top 0.152: 91.25,40.1 93.5,40.25 C4.1 | 91.25,40.1 91,40.75 D3.2 | 91.25,40.1 91,40 87.5,36.5 D4.1
N$6
  Top 0.152: J1.24 76.75,15.25 76.75,12.75 76.24,12.24 69.87,12.24 68.87,13.24 68.87,17.32 EPD_C12.1
N$7
  Top 0.152: R2_BAT.2 120.75,42.25 120.75,46 MCP73831.5
N$9
  Top 0.152: J1.22 77.75,15.5 77.75,18.25 76,20 EPD_C10.1
N$10
  Top 0.152: IC1.5 50.25,101.25 52,99.5 C_DELAY.1
N$11
  Top 0.152: J1.20 78.75,15.5 78.75,19.5 79.25,20 EPD_C8.1
N$12
  Top 0.152: R2-USB.1 151,39.5 151,34.25 151.25,34 156.92,34 165.74,42.82 165.74,55.26 164.75,56.25 163.75,56.25 J2.B5
N$13
  Top 0.152: J1.19 79.25,15.5 79.25,18.25 81,20 EPD_C7.1
N$14
  Top 0.152: EPD_C6.1 82.25,20 81.5,19.25 81.25,19.25 79.75,17.75 79.75,15.5 J1.18
N$17
  Top 0.152: J1.5 86.25,15.5 86.25,17.25 89,20 EPD_C2.1
N$18
  Top 0.152: J1.4 86.75,15.25 86.75,14.25 87.2,13.8 87.91,13.8 88.62,14.52 88.62,17.62 91,20 EPD_C1.1
N$22
  Top 0.152: R_CAPACITOR.2 88.25,51 85.5,53.75 85.5,64.25 D7.1
PREVGH
  Top 0.152: J1.21 78.25,15.5 78.25,19.5 77.75,20 EPD_C9.1 77.5,20.25 77,20.75 77,21.75 77.5,22.25 77.5,32.5 80.85,35.85 80.87,35.85 80.87,42.15 80.1,42.15 77.75,44.5 D5.1
PREVGL  (via drill 0.3)
  Top 0.152: 74.6,21.12 74.6,21.85 74.6,30.6 v76.25,32.25 | 74.6,21.12 EPD_C11.1 | 74.6,21.12 74.6,18.4 77.25,15.75 77.25,15.5 J1.23 | v86.75,32.25 90.75,36.25 D4.2
  Bottom 0.152: v76.25,32.25 v86.75,32.25
RESE  (via drill 0.3)
  Top 0.152: v87.25,16.25 87.25,15.5 J1.3 | v66,15.75 65.25,15 Q3.2 65.14,14.86 66.78,13.22 66.78,10.38 66.39,10 66,10 R3.1
  Bottom 0.152: v87.25,16.25 86.5,16.25 85.75,17 83.25,17 82,15.75 v66,15.75
RESE'
  Top 0.152: 63.25,11 65.75,11 R3.2 | 63.25,11 63.25,10.75 SJ1.2 63.25,11 | 63.25,11 63.25,12.75 63,13 R2.2
RESET  (via drill 0.3)
  Top 0.152: C5.1 53,106.75 53.75,107.5 53.75,108.25 52.25,109.75 51,109.75 RESET_BUTTON.3 50.75,110 47.5,110 RESET_BUTTON.4 47.25,110 46.25,109 46.25,108.75 45.75,108.25 | 45.75,108.25 45.25,107.75 R_RESET.2 45,107.5 44.25,106.75 44.25,77.25 v17.25,50.25 | 45.75,108.25 47.25,106.75 47.25,101.5 IC1.1 | v14.5,50.25 10.75,46.5 10.75,46.25 10.25,45.75 U2.3
  Bottom 0.152: v17.25,50.25 v14.5,50.25
RTC_RST  (via drill 0.3)
  Top 0.152: v23.25,61.75 23.25,62.75 23,63 U2.16 | v73.25,61.75 74.5,63 80,63 80,61.75 U3.4
  Bottom 0.152: v73.25,61.75 72.75,61.25 23.75,61.25 v23.25,61.75
RX
  Top 0.152: U2.24 12.75,63.25 13.25,63.75 13.25,67 14.25,68 TP2.TP
SCK  (via drill 0.3)
  Top 0.152: U1.6 41.25,56.75 40.75,56.25 40.75,39.5 41,39.25 41,38.75 42.25,37.5 43,37.5 D10.1 43.25,37.25 44,36.5 44,32.25 | J4.P5 5.75,91.5 3.75,91.5 3.75,76 TP8.TP 3.75,75.75 6,73.5 v6,64.25 | v82,18.75 82,17.25 82.25,17 82.25,15.5 J1.13 | 44,32.25 43.5,32.75 R6.1 | 44,32.25 v44.25,32 | v14.5,47 14.5,46.25 14,45.75 U2.6
  Bottom 0.152: v82,18.75 68.75,32 v44.25,32 43.25,33 39.5,33 25.5,47 21.5,47 | 21.5,47 v14.5,47 | v6,64.25 15.75,54.5 15.75,52.75 21.5,47
SCL  (via drill 0.3)
  Top 0.152: 161.75,23 163.75,21 165.3,21 J3.4 | U4.7 133.5,50 v134.5,50 134.75,50 134.75,50.5 135.75,51.5 141.85,51.5 145,48.35 145,42.91 149.83,38.08 149.83,34.92 161.75,23 | 161.75,23 161.75,9.25 | 161.75,9.25 161.75,8.25 160.25,6.75 R2-PINH.1 | v158.25,9.25 157.95,9.55 157.95,9.93 SENSOR2.4 | 161.75,9.25 v161.5,9.25 | v26.5,60.5 20,60.5 18.25,62.25 18.25,62.75 18,63 U2.20 | v74,60.5 79.75,54.75 84,54.75 84,52.5 U3.16 84,52.25 v84.75,51.5
  Bottom 0.152: v161.5,9.25 160.9,8.65 158.85,8.65 v158.25,9.25 | v74,60.5 v26.5,60.5 | v134.5,50 86.25,50 v84.75,51.5
SDA  (via drill 0.3)
  Top 0.152: 158.5,6.75 159,7.25 159,10.5 158.75,10.75 158.25,10.75 SENSOR2.3 | 158.5,6.75 158.25,6.5 R1_PINH.1 158.5,6.75 | v133.75,51.25 133.75,50.75 133.5,50.5 U4.8 | v166.95,19.75 165.55,19.75 J3.3 165.3,19.75 162.75,19.75 162.15,19.15 162.15,7.48 160.68,6.02 159.23,6.02 158.5,6.75 | v19.5,64.5 19.5,63.5 19.25,63.25 U2.19 | v69.5,64.5 73.25,60.75 73.25,60.25 79.75,53.75 82.5,53.75 82.5,52.5 U3.15
  Bottom 0.152: v166.95,19.75 135.45,51.25 v133.75,51.25 92,51.25 78.75,64.5 v69.5,64.5 69,65 20,65 v19.5,64.5
SRC  (via drill 0.3)
  Top 0.152: C4.2 93.5,41.5 91.5,41.5 88.5,44.5 81.25,44.5 D5.2 81,44.5 v81,43.25 | Q3.3 64.5,17 64.5,13.75 66.48,11.77 66.48,10.73 66.17,10.41 64.69,10.41 63.81,9.54 60.95,9.54 60.55,9.94 60.55,28.8 70.5,38.75 L1.1 76.5,38.75 v78,40.25
  Bottom 0.152: v78,40.25 v81,43.25
SS_SD
  Top 0.152: R10.1 12.25,98.5 14.09,98.5 D8.1 14,98.5 11.25,95.75 11.25,75.5 7.75,72 | U2.4 11.25,45.5 11,45.25 11,41.25 9.25,39.5 8.61,39.5 6.99,41.12 6.99,71.13 7.75,71.89 7.75,72 | J4.P2 6.25,88.25 7,87.5 7,86.75 6.75,86.5 6.75,71 7.75,72
TX
  Top 0.152: TP1.TP 11,63.5 11.25,63.25 U2.25
USB_D+  (via drill 0.3)
  Top 0.152: v147.25,50 147.25,49.75 149.75,47.25 D1.1 | v38.75,66.75 26,54 26,47.5 24.25,45.75 U2.14
  Bottom 0.152: v147.25,50 130.5,66.75 v38.75,66.75
USB_D-  (via drill 0.3)
  Top 0.152: v145.75,45 149.75,45 D1.3 | U2.13 23,45.75 23,52 36.25,65.25 v36.25,65.43
  Bottom 0.152: v145.75,45 142.09,45 121.82,65.28 36.4,65.28 v36.25,65.43
VBAT  (via drill 0.3)
  Top 0.152: U4.2 131.5,50 131.5,49.5 U4.3 131.25,49.5 130.75,49.5 | 127.5,48.25 129.5,46.25 129.5,45.5 Q1.3 | 127.5,48.25 127,48.75 C2_BAT.1 126.75,49 v125.75,49 | 130.75,49.5 127.5,49.5 127.5,48.25 | v124.25,49 123.5,48.25 MCP73831.3 | 130.75,49.5 130.75,48.5 134.5,48.5 136,50 TP3.TP
  Bottom 0.152: v125.75,49 v124.25,49
VBUS  (via drill 0.3)
  Top 0.3: CHG_LED.A 116.75,48.25 115.5,47 115.5,46 C1_BAT.1 | R1_PWRUSB.2 109.75,35.25 109.75,49 110.2,49.45 116.05,49.45 116.05,49.43 CHG_LED.A | 119.25,48.25 117,48.25 CHG_LED.A | 119.25,48.25 120.5,48.25 MCP73831.4 | 119.25,48.25 119.25,52.75 TP14.TP 119,53 117.75,54.25 117.75,57.33 118.67,58.25 119.73,58.25 120.68,57.3 141.45,57.3 v150.75,48 151.25,48 | D2.2 129.5,34.25 128.75,35 128.75,43.25 Q1.1 129.44,44.04 143.04,44.04 144.25,45.25 v144.25,45.75 | v148.5,45.75 147,45.75 C4_USB.1 | 151.25,48 154.75,48 154.75,47.75 C5_USB.1 | 151.25,48 151.25,46.25 152.25,46.25 D1.5 | v152,38.75 PFMF.050.1.2
  Bottom 0.3: v150.75,48 v148.5,45.75 | v152,38.75 152,42.25 v148.5,45.75 | v148.5,45.75 v144.25,45.75
VRTC
  Top 0.152: U3.14 81.5,52.25 81.5,51.25 82.5,50.25 C8.1 82.75,50.25 83.25,50.75 87.5,50.75 87.5,50.5 88.25,49.75 R_CAPACITOR.1 88.5,49.75 90.5,51.75 91.25,51.75 C10_SUPERCAP.2
VUSB  (via drill 0.3)
  Top 0.3: J2.A4 163.75,52 163.75,52.25 J2.B9 163.5,52.25 162.25,52.25 | J2.A9 163.75,57 163.75,56.75 J2.B4 163.5,56.75 163,56.75 162.25,56 162.25,52.25 | 162.25,52.25 v162.25,52 | PFMF.050.1.1 147.74,36.24 v149.4,37.9
  Bottom 0.3: v162.25,52 152.75,42.5 152.75,38.5 152.15,37.9 v149.4,37.9

## Text on the board
tPlace: SERIAL NO | OPEN BOOK V1.1